# Altium PCB PCB2.PcbDoc (part 3 of 4)
Units mm, origin at the board's own origin, x right, y up, seen from the top; angles counter-clockwise.
Board outline 247 x 102 mm, 2 copper layers (Top Layer, Bottom Layer); 199 components, 195 nets, 863 pads, 110 vias.
Unrouted connection lines stored in the file: 60.
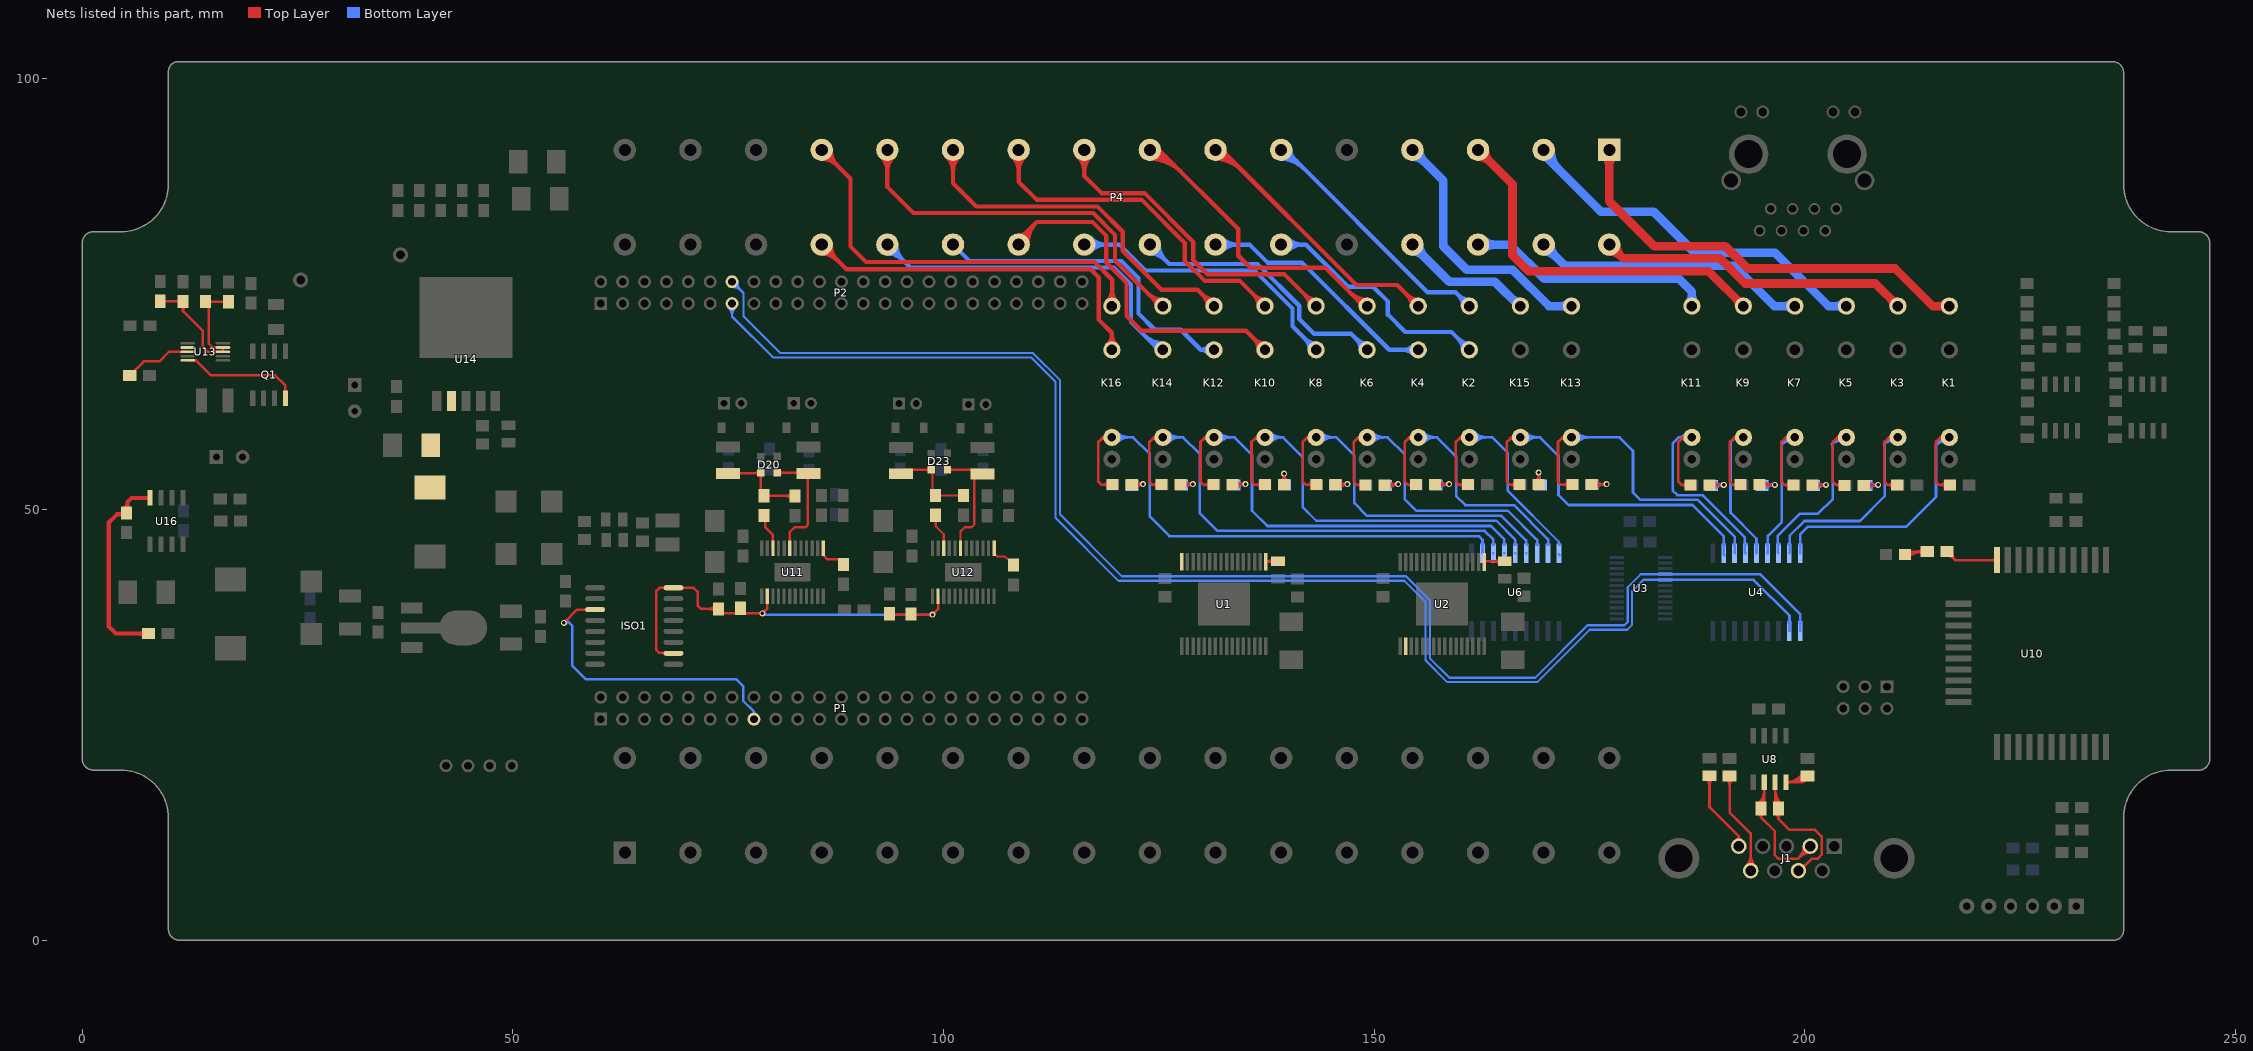
[diagram p3: the nets of this part, all layers, seen from the top]

## Via types
v1: diameter 0.7, hole 0.4, Top Layer to Bottom Layer, 110 vias

## Nets (pads, with @x,y where several pads share a name; then routed paths per layer and width w, separated by ;. In a path a pad name is that pad's centre, name@x,y a point inside that pad or via, vN(x,y) a via of type N, cw(c..) or ccw(c..) an arc to the next point about the centre after c; other vN are vias at no path point) (continued)
NetD6_1: D6.1 R6.2 | length 9
  Top Layer w0.3: D6.1@157.063,52.907 157.106,52.95 v1(158.7,52.95) ; D6.1@157.471,52.564 cw(c158.403,51.632) v1@158.403,52.95 ; D6.1@157.471,53.25 ccw(c158.195,53.974) 158.195,52.95 ; v1@158.559,52.809 ccw(c158.217,52.467) 158.217,52.95 ccw(c158.217,53.433) v1@158.559,53.091
  Bottom Layer w0.3: R6.2@157.176,52.86 157.266,52.95 v1(158.7,52.95) ; R6.2@157.434,52.729 cw(c157.967,52.196) 157.967,52.95 ; R6.2@157.646,52.517 cw(c158.691,51.472) v1@158.691,52.95 ; R6.2@157.646,53.203 ccw(c158.257,53.814) 158.257,52.95 ; v1@158.559,52.809 ccw(c158.217,52.467) 158.217,52.95 ccw(c158.217,53.433) v1@158.559,53.091
NetD7_1: D7.1 R7.2 | length 8.3
  Top Layer w0.3: D7.1@206.833,52.817 206.876,52.86 v1(208.51,52.86) ; D7.1@207.241,52.474 cw(c208.173,51.542) v1@208.173,52.86 ; D7.1@207.241,53.16 ccw(c207.965,53.884) 207.965,52.86 ; v1@208.369,52.719 ccw(c208.027,52.377) 208.027,52.86 ccw(c208.027,53.343) v1@208.369,53.001
  Bottom Layer w0.3: R7.2@207.076,52.81 207.126,52.86 v1(208.51,52.86) ; R7.2@207.546,52.467 cw(c208.495,51.518) v1@208.495,52.86 ; R7.2@207.546,53.153 ccw(c208.253,53.86) v1@208.253,52.86 ; v1@208.369,52.719 ccw(c208.027,52.377) 208.027,52.86 ccw(c208.027,53.343) v1@208.369,53.001
NetD8_1: D8.1 R8.1 | length 9.4
  Top Layer w0.3: D8.1@151.193,52.867 151.276,52.95 v1(152.78,52.95) ; D8.1@151.389,52.736 cw(c151.905,52.22) 151.905,52.95 ; D8.1@151.601,52.524 cw(c152.629,51.496) v1@152.629,52.95 ; D8.1@151.601,53.21 ccw(c152.229,53.838) 152.229,52.95 ; v1@152.639,52.809 ccw(c152.297,52.467) 152.297,52.95 ccw(c152.297,53.433) v1@152.639,53.091
  Bottom Layer w0.3: R8.1@151.3,52.79 151.46,52.95 v1(152.78,52.95) ccw(c152.78,51.694) R8.1@151.804,52.485 ; R8.1@151.571,52.674 cw(c152.151,52.204) 152.151,52.95 ; R8.1@151.77,53.133 ccw(c152.212,53.575) 152.212,52.95 ; v1@152.639,52.809 ccw(c152.297,52.467) 152.297,52.95 ccw(c152.297,53.433) v1@152.639,53.091
NetD9_1: D9.1 R9.2 | length 8.2
  Top Layer w0.3: D9.1@200.863,52.837 200.886,52.86 v1(202.45,52.86) ; D9.1@201.271,52.494 cw(c202.155,51.611) v1@202.155,52.86 ; D9.1@201.271,53.18 ccw(c202.044,53.952) 202.044,52.86 ; v1@202.309,52.719 ccw(c201.967,52.377) 201.967,52.86 ccw(c201.967,53.343) v1@202.309,53.001
  Bottom Layer w0.3: R9.2@201.016,52.81 201.066,52.86 v1(202.45,52.86) ; R9.2@201.486,52.467 cw(c202.435,51.518) v1@202.435,52.86 ; R9.2@201.486,53.153 ccw(c202.193,53.86) v1@202.193,52.86 ; v1@202.309,52.719 ccw(c201.967,52.377) 201.967,52.86 ccw(c201.967,53.343) v1@202.309,53.001
NetD10_1: D10.1 R10.1 | length 7.6
  Top Layer w0.3: D10.1@145.503,52.887 145.566,52.95 v1(146.89,52.95) ccw(c146.89,51.567) D10.1@145.911,52.544 ; D10.1@145.911,53.23 ccw(c146.587,53.906) v1@146.587,52.95 ; v1@146.749,52.809 ccw(c146.407,52.467) 146.407,52.95 ccw(c146.407,53.433) v1@146.749,53.091
  Bottom Layer w0.3: R10.1@145.73,52.82 145.86,52.95 v1(146.89,52.95) ccw(c146.89,51.839) R10.1@146.025,52.536 ; R10.1@145.99,53.183 ccw(c146.552,53.745) v1@146.552,52.95 ; v1@146.749,52.809 ccw(c146.407,52.467) 146.407,52.95 ccw(c146.407,53.433) v1@146.749,53.091
NetD11_1: D11.1 R11.2 | length 8.5
  Top Layer w0.3: D11.1@194.733,52.887 194.76,52.86 v1(196.51,52.86) ; D11.1@195.141,52.544 cw(c195.904,51.781) 195.904,52.86 ; D11.1@195.141,53.23 ccw(c196.034,54.123) 196.034,52.86 ; v1@196.369,52.719 ccw(c196.027,52.377) 196.027,52.86 ccw(c196.027,53.343) v1@196.369,53.001
  Bottom Layer w0.3: R11.2@195.016,52.81 195.066,52.86 v1(196.51,52.86) ; R11.2@195.486,52.467 cw(c196.435,51.518) v1@196.435,52.86 ; R11.2@195.486,53.153 ccw(c196.193,53.86) v1@196.193,52.86 ; v1@196.369,52.719 ccw(c196.027,52.377) 196.027,52.86 ccw(c196.027,53.343) v1@196.369,53.001
NetD12_1: D12.1 R12.1 | length 8
  Top Layer w0.3: D12.1@139.16,53.25 ccw(c138.268,54.143) v1@139.53,54.143 ; v1@139.389,54.029 cw(c139.047,53.687) 139.53,53.687 cw(c140.013,53.687) v1@139.671,54.029 ; D12.1@139.503,52.907 139.546,52.95 139.53,52.966 v1(139.53,54.17) ; v1@139.53,54.013 ccw(c140.609,54.013) D12.1@139.846,53.25
  Bottom Layer w0.3: R12.1@139.237,53.183 ccw(c138.53,53.89) v1@139.53,53.89 ; v1@139.389,54.029 cw(c139.047,53.687) 139.53,53.687 cw(c140.013,53.687) v1@139.671,54.029 ; v1@139.53,54.132 ccw(c140.872,54.132) R12.1@139.923,53.183 ; v1(139.53,54.17) 139.53,52.89 R12.1@139.58,52.84 R12.1@139.69,52.95
NetD13_1: D13.1 R13.2 | length 8.3
  Top Layer w0.3: D13.1@188.903,52.867 188.91,52.86 v1(190.58,52.86) ; D13.1@189.311,52.524 cw(c190.122,51.713) 190.122,52.86 ; D13.1@189.311,53.21 ccw(c190.156,54.055) 190.156,52.86 ; v1@190.439,52.719 ccw(c190.097,52.377) 190.097,52.86 ccw(c190.097,53.343) v1@190.439,53.001
  Bottom Layer w0.3: R13.2@189.146,52.81 189.196,52.86 v1(190.58,52.86) ; R13.2@189.616,52.467 cw(c190.565,51.518) v1@190.565,52.86 ; R13.2@189.616,53.153 ccw(c190.323,53.86) v1@190.323,52.86 ; v1@190.439,52.719 ccw(c190.097,52.377) 190.097,52.86 ccw(c190.097,53.343) v1@190.439,53.001
NetD14_1: D14.1 R14.1 | length 7.9
  Top Layer w0.3: D14.1@133.553,52.907 133.596,52.95 v1(135.05,52.95) ; D14.1@133.961,52.564 cw(c134.893,51.632) v1@134.893,52.95 ; D14.1@133.961,53.25 ccw(c134.685,53.974) 134.685,52.95 ; v1@134.909,52.809 ccw(c134.567,52.467) 134.567,52.95 ccw(c134.567,53.433) v1@134.909,53.091
  Bottom Layer w0.3: R14.1@133.69,52.83 133.81,52.95 v1(135.05,52.95) ccw(c135.05,51.876) R14.1@134.201,52.533 ; R14.1@134.16,53.173 ccw(c134.698,53.711) 134.698,52.95 ; v1@134.909,52.809 ccw(c134.567,52.467) 134.567,52.95 ccw(c134.567,53.433) v1@134.909,53.091
NetD15_1: D15.1 R15.2 | length 8.7
  Top Layer w0.3: D15.1@175.243,52.907 175.286,52.95 v1(176.99,52.95) ; D15.1@175.651,52.564 cw(c176.583,51.632) 176.583,52.95 ; D15.1@175.651,53.25 ccw(c176.375,53.974) 176.375,52.95 ; v1@176.849,52.809 ccw(c176.507,52.467) 176.507,52.95 ccw(c176.507,53.433) v1@176.849,53.091
  Bottom Layer w0.3: R15.2@175.276,52.88 175.346,52.95 v1(176.99,52.95) ; R15.2@175.746,52.537 cw(c176.743,51.54) v1@176.743,52.95 ; R15.2@175.746,53.223 ccw(c176.405,53.882) 176.405,52.95 ; v1@176.849,52.809 ccw(c176.507,52.467) 176.507,52.95 ccw(c176.507,53.433) v1@176.849,53.091
NetD16_1: D16.1 R16.1 | length 7.6
  Top Layer w0.3: D16.1@127.503,52.927 127.526,52.95 v1(128.94,52.95) ; D16.1@127.911,52.584 cw(c128.795,51.701) v1@128.795,52.95 ; D16.1@127.911,53.27 ccw(c128.684,54.042) v1@128.684,52.95 ; v1@128.799,52.809 ccw(c128.457,52.467) 128.457,52.95 ccw(c128.457,53.433) v1@128.799,53.091
  Bottom Layer w0.3: R16.1@127.81,52.8 127.96,52.95 v1(128.94,52.95) ; R16.1@128.08,53.183 ccw(c128.642,53.745) v1@128.642,52.95 ; R16.1@128.122,52.546 cw(c128.94,51.921) v1(128.94,52.95) ; v1@128.799,52.809 ccw(c128.457,52.467) 128.457,52.95 ccw(c128.457,53.433) v1@128.799,53.091
NetD17_1: D17.1 R17.2 | length 9
  Top Layer w0.3: D17.1@168.74,53.25 ccw(c167.92,54.07) v1@169.08,54.07 ; v1@168.939,54.159 cw(c168.597,53.817) 169.08,53.817 cw(c169.563,53.817) v1@169.221,54.159 ; v1@169.08,54.086 ccw(c170.262,54.086) D17.1@169.426,53.25 ; v1(169.08,54.3) 169.08,52.91 D17.1@169.083,52.907 D17.1@169.126,52.95
  Bottom Layer w0.3: R17.2@168.826,53.173 ccw(c168.213,53.786) 169.08,53.786 ; v1@168.939,54.159 cw(c168.597,53.817) 169.08,53.817 cw(c169.563,53.817) v1@169.221,54.159 ; 169.08,53.492 ccw(c169.831,53.492) R17.2@169.3,52.961 ; v1@169.08,54.216 ccw(c170.555,54.216) R17.2@169.512,53.173 ; v1(169.08,54.3) 169.08,53.046 R17.2@169.296,52.83 R17.2@169.416,52.95
NetD18_1: D18.1 R18.1 | length 7.5
  Top Layer w0.3: D18.1@121.843,52.907 121.886,52.95 v1(123.15,52.95) ccw(c123.15,51.711) D18.1@122.257,52.571 ; D18.1@121.863,52.87 D18.1@121.863,52.907 ; D18.1@122.251,53.25 ccw(c122.975,53.974) v1@122.975,52.95 ; v1@123.009,52.809 ccw(c122.667,52.467) 122.667,52.95 ccw(c122.667,53.433) v1@123.009,53.091
  Bottom Layer w0.3: R18.1@121.86,52.82 121.86,52.87 121.94,52.95 v1(123.15,52.95) ccw(c123.15,52.077) R18.1@122.415,52.548 ; R18.1@122.35,53.153 ccw(c122.84,53.643) v1@122.84,52.95 ; v1@123.009,52.809 ccw(c122.667,52.467) 122.667,52.95 ccw(c122.667,53.433) v1@123.009,53.091
NetD19_2: D19.2 R35.2 | length 7.8
  Top Layer w0.3: D19.2@211.46,44.5 212.07,45.11 R35.2@214.204,45.11 ; D19.2@211.813,44.672 cw(c212.87,43.615) 212.87,45.11 ; D19.2@212.025,44.46 cw(c213.594,42.891) R35.2@213.594,45.11 ; R35.2@213.734,44.767 ccw(c212.906,43.939) 212.906,45.11 ccw(c212.906,46.281) R35.2@213.734,45.453
NetD20_2: D20.2 FB1.1 R36.2 R37.2 | length 14.2
  Top Layer w0.3: FB1.1@74.98,54.206 78.716,54.206 D20.2@78.78,54.27 78.78,51.966 R36.2@79.15,51.596 82.72,51.596 R37.2@82.75,51.566 ; 77.962,54.206 ccw(c77.962,55.088) D20.2@78.586,54.464 ; 78.271,54.206 cw(c78.271,53.761) 78.586,54.076 cw(c78.116,53.606) 78.78,53.606 cw(c79.444,53.606) D20.2@78.974,54.076 ; 81.507,51.596 cw(c81.507,50.323) R37.2@82.407,51.223 ; 81.652,51.596 ccw(c81.652,52.664) R37.2@82.407,51.909
NetD20_3: D20.3 R40.1 U11.19 | length 15
  Top Layer w0.3: D20.3@80.68,54.27 84.236,54.27 R40.1@84.3,54.206 84.25,54.156 84.25,48.24 83.95,47.94 82.71,47.94 82.135,47.365 U11.19@82.135,45.506 ; D20.3@80.874,54.076 cw(c81.344,53.606) 81.344,54.27 cw(c81.344,54.934) D20.3@80.874,54.464
NetD23_2: D23.2 FB2.1 R41.2 R42.2 | length 11.5
  Top Layer w0.254: FB2.1@95.05,54.156 95.524,54.63 D23.2@98.56,54.63 98.73,54.46 98.73,51.626 R42.2@102.31,51.626 ; D23.2@98.349,54.419 ccw(c97.841,53.911) 97.841,54.63 ccw(c97.841,55.349) D23.2@98.349,54.841
NetD23_3: D23.3 R44.1 U12.19 | length 15.4
  Top Layer w0.254: D23.3@100.46,54.63 104.006,54.63 R44.1@104.5,54.136 ; D23.3@100.671,54.419 cw(c101.179,53.911) 101.179,54.63 cw(c101.179,55.349) D23.3@100.671,54.841 ; U12.19@101.965,45.506 101.965,47.455 102.45,47.94 103.24,47.94 103.55,48.25 103.55,53.58 R44.1@104.17,54.2
NetD28_2: D28.1 L2.1 U14.2
NetJ1_2: J1.2 R24.2 U8.6 | length 24.4
  Top Layer w0.3: R24.2@194.571,15.788 ccw(c192.868,17.491) U8.6@195.276,17.491 ; R24.2@194.659,14.702 cw(c194.378,14.246) 194.914,14.246 ; R24.2@194.783,15.576 ccw(c193.593,16.766) 195.276,16.766 ; R24.2@194.995,15.364 ccw(c194.317,16.042) R24.2@195.276,16.042 ; R24.2@195.169,14.702 ccw(c195.45,14.246) 194.914,14.246 ; U8.6@195.17,17.624 cw(c194.914,17.368) 195.276,17.368 cw(c195.638,17.368) U8.6@195.382,17.624 ; U8.6@195.276,18.33 195.276,15.642 R24.2@194.914,15.28 194.914,14.246 ; J1.2@199.886,10.92 cw(c198.075,10.92) 199.356,9.64 cw(c200.636,8.359) J1.2@200.636,10.17 ; J1.2@200.186,10.92 cw(c199.1,10.92) 199.868,10.152 cw(c200.636,9.384) J1.2@200.636,10.47 ; J1.2@200.636,10.92 199.156,9.44 196.95,9.44 196.5,9.89 196.5,12.66 194.914,14.246
NetJ1_5: J1.5 R26.2 | length 12.5
  Top Layer w0.3: R26.2@188.567,18.751 cw(c187.715,17.899) 188.92,17.899 ; R26.2@188.91,19.094 188.92,19.084 188.92,15.44 192.326,12.034 ; 188.92,17.947 cw(c190.057,17.947) R26.2@189.253,18.751 ; J1.5@192.044,11.615 ccw(c191.874,12.034) 192.326,12.034 ; J1.5@192.326,10.92 192.326,12.034 ; J1.5@192.608,11.615 cw(c192.778,12.034) 192.326,12.034
NetJ1_7: J1.7 R24.1 U8.7 | length 22.2
  Top Layer w0.3: U8.7@196.44,17.624 cw(c196.184,17.368) 196.546,17.368 cw(c196.908,17.368) U8.7@196.652,17.624 ; 196.546,16.132 ccw(c197.633,16.132) R24.1@196.865,15.364 ; 196.546,16.857 ccw(c198.358,16.857) R24.1@197.077,15.576 ; U8.7@196.546,17.581 ccw(c199.082,17.581) R24.1@197.289,15.788 ; U8.7@196.546,18.33 196.546,15.628 R24.1@196.92,15.254 ; R24.1@196.62,14.755 cw(c196.008,14.08) 196.92,14.08 cw(c197.739,14.08) R24.1@197.241,14.73 ; R24.1@196.946,15.28 R24.1@196.92,15.254 ; J1.7@199.251,8.08 199.42,8.08 200.78,9.44 201.46,9.44 201.94,9.92 201.94,12.05 201.19,12.8 198.2,12.8 196.92,14.08 R24.1@196.92,15.254
NetJ1_9: J1.9 R25.1 | length 18.4
  Top Layer w0.3: R25.1@190.917,18.741 cw(c190.089,17.913) 191.26,17.913 cw(c192.431,17.913) R25.1@191.603,18.741 ; R25.1@191.26,19.084 191.26,14.85 193.711,12.399 J1.9@193.711,8.08 ; J1.9@193.181,8.61 ccw(c191.9,9.891) 193.711,9.891 ccw(c195.522,9.891) J1.9@194.241,8.61 ; J1.9@193.393,8.398 ccw(c192.625,9.166) 193.711,9.166 ccw(c194.797,9.166) J1.9@194.029,8.398
NetQ1_4: Q1.4 U13.10 | length 14.6
  Top Layer w0.3: U13.10@12.23,67.31 13.21,67.31 14.94,65.58 22.4,65.58 23.58,64.4 23.58,62.964 Q1.4@23.594,62.95 ; Q1.4@23.488,63.656 ccw(c23.265,63.879) 23.58,63.879 ; 23.58,63.945 ccw(c23.989,63.945) Q1.4@23.7,63.656
NetR1_2: R1.2 U1.17 | length 3
  Top Layer w0.3: U1.17@137.41,43.93 137.46,43.98 R1.2@138.84,43.98 ; R1.2@138.307,43.697 ccw(c137.624,43.014) 137.624,43.98 ccw(c137.624,44.946) R1.2@138.307,44.263
NetR2_2: R2.2 U2.17 | length 3.9
  Top Layer w0.3: U2.17@162.76,43.91 162.83,43.98 R2.2@165.15,43.98 ; R2.2@164.617,43.697 ccw(c163.934,43.014) 163.934,43.98 ccw(c163.934,44.946) R2.2@164.617,44.263
NetR20_1: R20.1 U8.8 | length 11.2
  Top Layer w0.3: U8.8@197.922,18.224 cw(c198.178,17.968) 198.178,18.33 cw(c198.178,18.692) U8.8@197.922,18.436 ; 198.378,18.33 ccw(c198.378,20.259) R20.1@199.981,19.187 ; 198.939,18.33 ccw(c198.939,19.883) R20.1@200.231,19.02 ; 199.501,18.33 ccw(c199.501,19.508) R20.1@200.48,18.853 ; R20.1@199.702,18.866 cw(c199.351,18.69) 199.629,18.413 cw(c200.082,17.959) R20.1@200.112,18.6 ; R20.1@199.732,19.354 cw(c197.816,20.634) U8.8@197.816,18.33 199.546,18.33 R20.1@200.3,19.084
NetR35_1: R35.1 U10.11 | length 8.6
  Top Layer w0.3: R35.1@216.49,45.11 217.466,44.134 U10.11@222.28,44.134 ; R35.1@216.617,44.625 cw(c216.617,43.761) 217.228,44.372 ; R35.1@217.099,45.058 ccw(c218.149,44.944) 217.402,44.198 ; U10.11@222.139,43.993 ccw(c221.797,43.651) 221.797,44.134 ccw(c221.797,44.617) U10.11@222.139,44.275
NetR36_1: R36.1 U11.22 | length 4.2
  Top Layer w0.3: R36.1@79.15,49.31 79.29,49.17 79.29,47.95 80.184,47.056 U11.22@80.184,45.506
NetR39_2: R39.2 U11.13 | length 3.3
  Top Layer w0.3: U11.13@86.036,45.506 86.036,44.704 86.49,44.25 87.82,44.25 R39.2@88.2,43.87
NetR41_1: R41.1 U12.22 | length 4.2
  Top Layer w0.254: R41.1@99.04,49.34 99.1,49.28 99.1,48.06 100.014,47.146 U12.22@100.014,45.506
NetR43_2: R43.2 U12.13 | length 3.4
  Top Layer w0.254: U12.13@105.866,45.506 105.866,44.924 106.23,44.56 107.096,44.56 R43.2@108.11,43.546
NetR46_1: R46.1 R49.2 U13.4 | length 9.3
  Top Layer w0.3: R49.2@14.28,74.154 14.69,73.744 14.69,69.25 15.13,68.81 U13.4@16.33,68.81 ; R49.2@14.56,74.05 14.64,74.13 R46.1@16.96,74.13
NetR47_1: R47.1 R50.2 U13.3 | length 13.1
  Top Layer w0.3: R47.1@9.05,74.18 9.066,74.164 R50.2@11.68,74.164 11.68,73.05 ; R50.2@11.384,73.653 cw(c10.918,73.05) 11.68,73.05 ; R50.2@11.976,73.653 ccw(c12.442,73.05) 11.68,73.05 ; 16.33,68.61 U13.3@16.33,68.31 14.58,68.31 13.99,68.9 13.99,70.74 11.68,73.05
NetR48_2: R48.2 U13.8 | length 7.9
  Top Layer w0.3: R48.2@5.504,65.56 7.154,67.21 8.94,67.21 10.04,68.31 U13.8@12.23,68.31
NetR51_2: U13.7
NetR54_1: R54.1 R55.1 U16.4 | length 28
  Top Layer w0.5: 4.117,49.44 ccw(c4.117,50.516) R55.1@4.878,49.755 ; 4.324,49.44 cw(c4.324,48.657) R55.1@4.878,49.211 ; R55.1@4.885,50.016 ccw(c4.055,50.89) 5.26,50.89 ; 5.26,50.401 ccw(c5.814,50.401) R55.1@5.422,50.009 ; R54.1@7.281,35.328 ccw(c6.624,34.671) 6.624,35.6 ccw(c6.624,36.529) R54.1@7.281,35.872 ; R54.1@7.68,35.6 3.9,35.6 3.08,36.42 3.08,48.49 4.03,49.44 4.98,49.44 5.26,49.72 5.26,50.89 ; U16.4@7.876,51.35 5.72,51.35 5.26,50.89
NetU1_32: U1.32 U2.2
O5V_ISO: C20.1 C21.1 C31.1 C32.1 ISO1.10 ISO1.16 U11.2 U12.2 | length 60.3
  Top Layer w0.3: 67.319,33.35 cw(c67.319,32.834) ISO1.10@67.684,33.199 ; 67.392,40.91 ccw(c67.392,41.323) ISO1.16@67.684,41.031 ; 67.464,40.91 cw(c67.464,40.599) ISO1.16@67.684,40.819 ; ISO1.10@68.64,33.305 68.595,33.35 66.98,33.35 66.65,33.68 66.65,40.54 67.02,40.91 70.97,40.91 71.47,40.41 71.47,38.81 71.81,38.47 C21.1@73.86,38.47 74.38,37.95 v1(78.96,37.95) 79.532,38.522 U11.2@79.532,39.944 ; ISO1.16@68.64,40.925 ISO1.16@68.655,40.91 ; ISO1.16@69.596,40.819 cw(c69.816,40.599) 69.816,40.91 ; ISO1.16@69.596,41.031 ccw(c69.888,41.323) 69.888,40.91 ; C21.1@73.517,38.127 ccw(c72.689,37.299) 72.689,38.47 ccw(c72.689,39.641) C21.1@73.517,38.813 ; v1@78.819,37.809 ccw(c78.477,37.467) 78.477,37.95 ccw(c78.477,38.433) v1@78.819,38.091 ; v1@78.96,38.15 ccw(c78.96,38.633) 79.301,38.291 ccw(c79.643,37.95) v1@79.16,37.95 ; C31.1@93.72,37.9 93.82,37.8 v1(98.71,37.8) 99.362,38.452 U12.2@99.362,39.944 ; v1@98.569,37.659 ccw(c98.227,37.317) 98.227,37.8 ccw(c98.227,38.283) v1@98.569,37.941 ; v1@98.71,38 ccw(c98.71,38.483) 99.051,38.141 ccw(c99.393,37.8) v1@98.91,37.8
  Bottom Layer w0.3: v1(78.96,37.95) 79.11,37.8 v1(98.71,37.8) ; v1@98.569,37.659 ccw(c98.227,37.317) 98.227,37.8 ccw(c98.227,38.283) v1@98.569,37.941
OUT_C\S\: ISO1.3 P1.15 | length 37.8
  Top Layer w0.3: v1(55.92,36.85) 57.455,38.385 ISO1.3@59.54,38.385 ; v1@55.92,37.05 ccw(c55.92,37.533) 56.261,37.191 ccw(c56.603,36.85) v1@56.12,36.85 ; ISO1.3@58.584,38.279 ccw(c58.328,38.023) 58.328,38.385 ccw(c58.328,38.747) ISO1.3@58.584,38.491
  Bottom Layer w0.3: v1(55.92,36.85) 56.03,36.96 56.43,36.96 ; v1@56.098,36.758 cw(c56.43,36.586) 56.43,36.96 ; P1.15@77.756,26.216 ccw(c77.627,26.542) 77.978,26.542 ; P1.15@77.978,25.658 77.978,26.542 ; P1.15@78.2,26.216 cw(c78.329,26.542) 77.978,26.542 ; 56.43,36.96 56.91,36.48 56.91,31.86 58.45,30.32 75.89,30.32 76.72,29.49 76.72,27.8 77.978,26.542
OUT_PIN0: K1.1 P4.1 | length 55.4
  Top Layer w1: P4.1@176.726,91.194 cw(c175.361,89.829) 177.292,89.829 cw(c179.223,89.829) P4.1@177.858,91.194 ; P4.1@177.292,91.76 177.292,85.788 182.5,80.58 190.76,80.58 193.36,77.98 210.47,77.98 214.828,73.622 K1.1@216.774,73.622 ; K1.1@216.42,73.268 ccw(c215.567,72.415) 215.567,73.622 ccw(c215.567,74.829) K1.1@216.42,73.976
OUT_PIN1: K3.1 P4.2 | length 41.4
  Top Layer w1: P4.2@177.292,79.96 cw(c177.292,78.029) 178.658,79.394 cw(c180.023,80.76) P4.2@178.092,80.76 ; P4.2@177.292,80.76 178.862,79.19 190.12,79.19 193.06,76.25 208.167,76.25 K3.1@210.795,73.622 ; K3.1@210.295,73.622 ccw(c209.088,73.622) 209.942,74.476 ccw(c210.795,75.329) K3.1@210.795,74.122
OUT_PIN2: K5.1 P4.3 | length 47.4
  Bottom Layer w1: P4.3@169.672,91.76 169.672,91.228 176.32,84.58 182.44,84.58 187.2,79.82 196.54,79.82 202.738,73.622 K5.1@204.816,73.622 ; P4.3@170.472,91.76 ccw(c173.688,91.76) 171.414,89.486 ; K5.1@204.463,73.268 ccw(c203.609,72.415) 203.609,73.622 ccw(c203.609,74.829) K5.1@204.463,73.976
OUT_PIN3: K7.1 P4.4 | length 37.1
  Bottom Layer w1: P4.4@169.672,79.96 cw(c169.672,78.029) 171.038,79.394 cw(c172.403,80.76) P4.4@170.472,80.76 ; P4.4@169.672,80.76 172.112,78.32 191.75,78.32 196.448,73.622 K7.1@198.837,73.622 ; K7.1@198.484,73.268 ccw(c197.63,72.415) 197.63,73.622 ccw(c197.63,74.829) K7.1@198.484,73.976
OUT_PIN4: K9.1 P4.5 | length 48.1
  Top Layer w1: P4.5@162.052,90.96 cw(c162.052,89.029) 163.418,90.394 cw(c164.783,91.76) P4.5@162.852,91.76 ; P4.5@162.052,91.76 166.05,87.762 166.05,79.53 167.9,77.68 188.801,77.68 K9.1@192.859,73.622 ; K9.1@192.359,73.622 ccw(c191.151,73.622) 192.005,74.476 ccw(c192.859,75.329) K9.1@192.859,74.122
OUT_PIN5: K11.1 P4.6 | length 33.7
  Bottom Layer w1: P4.6@162.052,80.76 165.77,80.76 169.73,76.8 185.37,76.8 186.88,75.29 K11.1@186.88,73.622 ; P4.6@162.618,80.194 cw(c163.983,78.829) 163.983,80.76 cw(c163.983,82.691) P4.6@162.618,81.326 ; K11.1@186.526,73.976 ccw(c185.673,74.829) 186.88,74.829 ccw(c188.087,74.829) K11.1@187.233,73.976
OUT_PIN6: K13.1 P4.7 | length 35.4
  Bottom Layer w1: P4.7@154.432,90.96 cw(c154.432,89.029) 155.798,90.394 cw(c157.163,91.76) P4.7@155.232,91.76 ; P4.7@154.432,91.76 158,88.192 158,80.58 160.74,77.84 166.06,77.84 170.278,73.622 K13.1@172.898,73.622 ; K13.1@172.544,73.268 ccw(c171.691,72.415) 171.691,73.622 ccw(c171.691,74.829) K13.1@172.544,73.976
OUT_PIN7: K15.1 P4.8 | length 20
  Bottom Layer w1: P4.8@154.25,80.92 158.71,76.46 164,76.46 166.838,73.622 K15.1@166.969,73.622 ; P4.8@154.432,79.96 cw(c154.432,78.082) 155.76,79.41 ; P4.8@155.232,80.76 ccw(c157.216,80.76) 155.813,79.357 ; 165.892,74.568 ccw(c166.969,75.644) K15.1@166.969,74.122
OUT_PIN8: K2.1 P4.11 | length 39.3
  Bottom Layer w0.5: P4.11@138.47,91.67 139.75,91.67 156.19,75.23 159.431,75.23 K2.1@161.039,73.622 ; P4.11@139.192,90.71 cw(c139.192,87.045) 141.783,89.637 ; P4.11@139.192,91.21 cw(c139.192,88.752) 140.93,90.49 ; P4.11@139.192,91.76 P4.11@139.7,91.76 ; P4.11@140.242,91.76 ccw(c141.647,91.76) 140.654,90.766 ; K2.1@160.289,73.622 ccw(c158.478,73.622) 159.759,74.902 ccw(c161.039,76.183) K2.1@161.039,74.372
OUT_PIN9: K2.2 P4.12 | length 36.7
  Bottom Layer w0.5: P4.12@139.192,80.76 142.04,80.76 146.93,75.87 149.86,75.87 151.58,74.15 151.58,72.63 153.6,70.61 158.971,70.61 K2.2@161.039,68.542 ; P4.12@139.581,80.371 cw(c140.52,79.432) 140.52,80.76 cw(c140.52,82.088) P4.12@139.581,81.149 ; P4.12@139.934,80.018 cw(c141.727,78.225) 141.727,80.76 cw(c141.727,83.295) P4.12@139.934,81.502 ; K2.2@160.289,68.542 ccw(c158.478,68.542) 159.759,69.822 ccw(c161.039,71.103) K2.2@161.039,69.292
OUT_PIN10: K4.1 P4.13 | length 41.5
  Top Layer w0.5: P4.13@131.572,90.71 cw(c131.572,86.562) 134.505,89.495 ; P4.13@131.572,91.21 cw(c131.572,88.269) 133.651,90.349 ; P4.13@131.572,91.71 cw(c131.572,89.977) 132.798,91.202 ; P4.13@131.572,91.76 131.852,91.48 132.52,91.48 147.93,76.07 152.662,76.07 K4.1@155.11,73.622 ; P4.13@132.622,91.76 ccw(c133.544,91.76) 132.892,91.108 ; K4.1@154.36,73.622 ccw(c152.549,73.622) 153.829,74.902 ccw(c155.11,76.183) K4.1@155.11,74.372
OUT_PIN11: K4.2 P4.14 | length 37.5
  Bottom Layer w0.5: P4.14@131.572,80.76 135.53,80.76 137.62,78.67 141.61,78.67 151.738,68.542 K4.2@155.11,68.542 ; P4.14@131.961,80.371 cw(c132.9,79.432) 132.9,80.76 cw(c132.9,82.088) P4.14@131.961,81.149 ; P4.14@132.314,80.018 cw(c134.107,78.225) 134.107,80.76 cw(c134.107,83.295) P4.14@132.314,81.502 ; K4.2@154.579,68.012 ccw(c153.299,66.731) 153.299,68.542 ccw(c153.299,70.353) K4.2@154.579,69.072
OUT_PIN12: K6.1 P4.15 | length 47.9
  Top Layer w0.5: P4.15@123.952,90.71 cw(c123.952,85.597) 127.568,89.212 ; P4.15@123.952,91.21 cw(c123.952,87.304) 126.714,90.066 ; P4.15@123.952,91.71 cw(c123.952,89.011) 125.861,90.919 ; P4.15@123.952,91.76 125.02,91.76 134.22,82.56 134.22,79.47 135.602,78.088 144.272,78.088 148.738,73.622 K6.1@149.18,73.622 ; 147.145,75.215 ccw(c149.18,77.25) K6.1@149.18,74.372 ; 147.999,74.361 ccw(c149.18,75.543) K6.1@149.18,73.872 ; 148.213,74.147 cw(c147.687,73.622) K6.1@148.43,73.622
OUT_PIN13: K6.2 P4.16 | length 40.1
  Bottom Layer w0.5: P4.16@123.952,79.71 cw(c123.952,77.175) 125.744,78.968 cw(c127.537,80.76) P4.16@125.002,80.76 ; P4.16@123.952,80.21 cw(c123.952,78.882) 124.891,79.821 cw(c125.83,80.76) P4.16@124.502,80.76 ; P4.16@123.952,80.76 126.198,78.514 136.456,78.514 141.3,73.67 141.3,72.13 143.01,70.42 147.302,70.42 K6.2@149.18,68.542 ; K6.2@148.43,68.542 ccw(c146.62,68.542) 147.9,69.822 ccw(c149.18,71.103) K6.2@149.18,69.292
OUT_PIN14: K8.1 P4.17 | length 46.4
  Top Layer w0.5: P4.17@115.59,91.018 cw(c113.797,89.225) 116.332,89.225 cw(c118.867,89.225) P4.17@117.074,91.018 ; P4.17@115.943,91.371 cw(c115.004,90.432) 116.332,90.432 cw(c117.66,90.432) P4.17@116.721,91.371 ; P4.17@116.332,91.76 116.332,88.728 118.326,86.734 123.316,86.734 128.99,81.06 128.99,78.946 130.602,77.334 139.539,77.334 K8.1@143.251,73.622 ; K8.1@142.501,73.622 ccw(c140.69,73.622) 141.97,74.902 ccw(c143.251,76.183) K8.1@143.251,74.372
OUT_PIN15: K8.2 P4.18 | length 42.1
  Bottom Layer w0.5: P4.18@116.332,80.76 120.43,80.76 123.43,77.76 136.11,77.76 140.52,73.35 140.52,71.273 K8.2@143.251,68.542 ; P4.18@116.721,80.371 cw(c117.66,79.432) 117.66,80.76 cw(c117.66,82.088) P4.18@116.721,81.149 ; P4.18@117.074,80.018 cw(c118.867,78.225) 118.867,80.76 cw(c118.867,83.295) P4.18@117.074,81.502 ; K8.2@142.501,68.542 ccw(c140.69,68.542) 141.97,69.822 ccw(c143.251,71.103) K8.2@143.251,69.292
OUT_PIN16: K10.1 P4.19 | length 48.4
  Top Layer w0.5: P4.19@107.97,91.018 cw(c106.177,89.225) 108.712,89.225 cw(c111.247,89.225) P4.19@109.454,91.018 ; P4.19@108.323,91.371 cw(c107.384,90.432) 108.712,90.432 cw(c110.04,90.432) P4.19@109.101,91.371 ; P4.19@108.712,91.76 108.712,88.068 110.8,85.98 122.97,85.98 128.01,80.94 128.01,78.86 130.29,76.58 134.363,76.58 K10.1@137.321,73.622 ; K10.1@136.571,73.622 ccw(c134.761,73.622) 136.041,74.902 ccw(c137.321,76.183) K10.1@137.321,74.372
OUT_PIN17: K10.2 P4.20 | length 48.9
  Top Layer w0.5: P4.20@108.712,80.76 108.712,81.282 110.82,83.39 ; P4.20@108.712,81.81 ccw(c108.712,83.085) 109.613,82.183 ; P4.20@109.262,80.769 cw(c111.732,80.808) 109.985,82.555 ; P4.20@109.762,80.777 cw(c113.375,80.834) 110.82,83.39 ; K10.2@136.571,68.542 ccw(c134.761,68.542) 136.041,69.822 ccw(c137.321,71.103) K10.2@137.321,69.292 ; K10.2@137.321,68.542 135.113,70.75 122.99,70.75 121.24,72.5 121.24,76.31 118.9,78.65 118.9,81.77 117.28,83.39 110.82,83.39
OUT_PIN18: K12.1 P4.21 | length 50.5
  Top Layer w0.5: P4.21@100.35,91.018 cw(c98.557,89.225) 101.092,89.225 cw(c103.627,89.225) P4.21@101.834,91.018 ; P4.21@100.703,91.371 cw(c99.764,90.432) 101.092,90.432 cw(c102.42,90.432) P4.21@101.481,91.371 ; P4.21@101.092,91.76 101.092,87.878 103.796,85.174 117.876,85.174 120.8,82.25 120.8,80.02 125.3,75.52 129.494,75.52 K12.1@131.392,73.622 131.508,73.622 K12.1@131.59,73.54 ; K12.1@130.642,73.622 ccw(c128.831,73.622) 130.112,74.902 ccw(c131.392,76.183) K12.1@131.392,74.372
OUT_PIN19: K12.2 P4.22 | length 40
  Bottom Layer w0.5: P4.22@101.092,80.76 102.998,78.854 120.666,78.854 122.63,76.89 122.63,72.76 124.52,70.87 127.53,70.87 129.858,68.542 ; K12.2@130.8,68.081 ccw(c129.858,67.349) 129.858,68.542 ; K12.2@130.8,69.003 cw(c129.858,69.735) 129.858,68.542 ; K12.2@131.392,68.542 129.858,68.542
OUT_PIN20: K14.1 P4.23 | length 53.7
  Top Layer w0.5: P4.23@92.73,91.018 cw(c90.937,89.225) 93.472,89.225 cw(c96.007,89.225) P4.23@94.214,91.018 ; P4.23@93.083,91.371 cw(c92.144,90.432) 93.472,90.432 cw(c94.8,90.432) P4.23@93.861,91.371 ; P4.23@93.472,91.76 93.472,87.458 96.51,84.42 117.38,84.42 119.91,81.89 119.91,78.88 125.168,73.622 K14.1@125.462,73.622 ; 123.679,75.111 ccw(c125.462,76.894) K14.1@125.462,74.372 ; 124.39,74.4 cw(c123.613,73.622) K14.1@124.712,73.622 ; 124.533,74.257 ccw(c125.462,75.186) K14.1@125.462,73.872
OUT_PIN21: K14.2 P4.24 | length 49.8
  Bottom Layer w0.5: P4.24@93.472,79.71 cw(c93.472,77.175) 95.264,78.968 cw(c97.057,80.76) P4.24@94.522,80.76 ; P4.24@93.472,80.21 cw(c93.472,78.882) 94.411,79.821 cw(c95.35,80.76) P4.24@94.022,80.76 ; P4.24@93.472,80.76 96.132,78.1 119.76,78.1 121.76,76.1 121.76,71.78 124.998,68.542 K14.2@125.462,68.542 ; 123.389,70.151 ccw(c125.462,72.224) K14.2@125.462,69.292 ; 124.243,69.297 ccw(c125.462,70.517) K14.2@125.462,68.792 ; 124.511,69.029 cw(c124.023,68.542) K14.2@124.712,68.542
OUT_PIN22: K16.1 P4.25 | length 56.6
  Top Layer w0.5: P4.25@85.852,90.71 cw(c85.852,88.175) 87.644,89.968 cw(c89.437,91.76) P4.25@86.902,91.76 ; P4.25@85.852,91.21 cw(c85.852,89.882) 86.791,90.821 cw(c87.73,91.76) P4.25@86.402,91.76 ; P4.25@85.852,91.76 89.2,88.412 89.2,80.54 91,78.74 117.53,78.74 119.58,76.69 119.58,73.669 K16.1@119.533,73.622 ; K16.1@119.003,74.152 ccw(c117.609,75.546) 119.58,75.546 ; 119.58,75.319 ccw(c121.23,75.319) K16.1@120.063,74.152
OUT_PIN23: K16.2 P4.26 | length 51.7
  Top Layer w0.5: P4.26@85.852,79.71 cw(c85.852,77.175) 87.644,78.968 cw(c89.437,80.76) P4.26@86.902,80.76 ; P4.26@85.852,80.21 cw(c85.852,78.882) 86.791,79.821 cw(c87.73,80.76) P4.26@86.402,80.76 ; P4.26@85.852,80.76 88.722,77.89 117.09,77.89 118,76.98 118,72.06 119.533,70.527 K16.2@119.533,68.542 ; K16.2@119.003,69.072 ccw(c117.722,70.353) 119.533,70.353 ccw(c121.344,70.353) K16.2@120.063,69.072
OUT_SIG0: D4.2 K1.3 U4.18 | length 43.8
  Top Layer w0.3: 215.28,57.926 cw(c216.134,57.072) K1.3@216.664,58.157 ; 215.578,58.223 cw(c216.329,57.471) K1.3@216.796,58.427 ; D4.2@216.445,52.524 ccw(c215.617,51.696) 215.617,52.867 ccw(c215.617,54.038) D4.2@216.445,53.21 ; D4.2@216.588,52.867 215.577,52.867 215.204,53.24 215.204,57.85 215.734,58.38 K1.3@216.772,58.38
  Bottom Layer w0.3: U4.18@199.369,45.889 ccw(c199.172,46.086) 199.45,46.086 ; 199.45,46.134 ccw(c199.797,46.134) U4.18@199.551,45.889 ; U4.18@199.46,44.921 199.45,44.931 199.45,47.13 200.34,48.02 211.78,48.02 215.22,51.46 215.22,57.46 216.142,58.382 K1.3@216.774,58.382 ; 215.264,57.504 cw(c216.239,56.528) K1.3@216.622,57.854 ; 215.623,57.863 cw(c216.4,57.086) K1.3@216.705,58.142 ; 215.77,58.01 ccw(c215.398,58.382) K1.3@215.924,58.382
OUT_SIG1: D5.2 K3.3 U4.17 | length 39.6
  Top Layer w0.3: 209.301,57.926 cw(c210.156,57.072) K3.3@210.685,58.157 ; 209.599,58.223 cw(c210.351,57.471) K3.3@210.817,58.427 ; D5.2@210.282,52.542 ccw(c209.599,51.988) 209.599,52.867 ; D5.2@210.301,53.175 cw(c209.599,53.822) 209.599,52.867 ; D5.2@210.609,52.867 209.598,52.867 ; K3.3@210.793,58.38 209.755,58.38 209.225,57.85 209.225,53.24 209.598,52.867
  Bottom Layer w0.3: U4.17@198.098,45.889 ccw(c197.757,46.231) 198.24,46.231 ; U4.17@198.19,44.921 198.24,44.971 198.24,46.97 199.94,48.67 206.37,48.67 209.27,51.57 209.27,57.7 209.952,58.382 K3.3@210.795,58.382 ; 209.165,57.595 cw(c210.082,56.677) K3.3@210.583,57.875 ; 209.481,57.911 cw(c210.269,57.123) K3.3@210.699,58.151 ; 209.798,58.228 cw(c210.456,57.57) K3.3@210.814,58.428
OUT_SIG2: D7.2 K5.3 U4.16 | length 35
  Top Layer w0.3: 203.322,57.926 cw(c204.177,57.072) K5.3@204.707,58.157 ; 203.62,58.223 cw(c204.372,57.471) K5.3@204.838,58.427 ; D7.2@204.141,52.57 ccw(c203.62,52.261) 203.62,52.867 ; D7.2@204.188,53.13 cw(c203.62,53.612) 203.62,52.867 ; D7.2@204.63,52.867 203.62,52.867 ; K5.3@204.814,58.38 203.777,58.38 203.247,57.85 203.247,53.24 203.62,52.867
  Bottom Layer w0.3: 196.87,46.231 ccw(c197.353,46.231) U4.16@197.011,45.889 ; U4.16@196.92,44.921 196.87,44.971 196.87,46.97 199.39,49.49 201.49,49.49 203.25,51.25 203.25,57.69 203.942,58.382 K5.3@204.816,58.382 ; 203.133,57.573 cw(c204.097,56.609) K5.3@204.61,57.872 ; 203.453,57.893 cw(c204.282,57.064) K5.3@204.722,58.15 ; 203.773,58.213 cw(c204.466,57.52) K5.3@204.835,58.428
OUT_SIG3: D9.2 K7.3 U4.15 | length 30.3
  Top Layer w0.3: 197.344,57.926 cw(c198.198,57.072) K7.3@198.728,58.157 ; 197.641,58.223 cw(c198.393,57.471) K7.3@198.859,58.427 ; D9.2@198.181,52.573 ccw(c197.641,52.223) 197.641,52.867 ; D9.2@198.21,53.14 cw(c197.641,53.596) 197.641,52.867 ; D9.2@198.651,52.867 197.641,52.867 ; K7.3@198.835,58.38 197.798,58.38 197.268,57.85 197.268,53.24 197.641,52.867
  Bottom Layer w0.3: U4.15@195.558,45.889 ccw(c195.217,46.231) 195.7,46.231 ; U4.15@195.65,44.921 195.7,44.971 195.7,46.94 197.33,48.57 197.33,57.59 198.122,58.382 K7.3@198.837,58.382 ; 197.306,57.566 cw(c198.213,56.659) K7.3@198.65,57.865 ; 197.639,57.899 cw(c198.39,57.148) K7.3@198.752,58.147
OUT_SIG4: D11.2 K9.3 U4.14 | length 30.6
  Top Layer w0.3: 191.365,57.926 cw(c192.219,57.072) K9.3@192.749,58.157 ; 191.662,58.223 cw(c192.414,57.471) K9.3@192.88,58.427 ; D11.2@192.02,53.094 cw(c191.662,53.262) 191.662,52.867 ; D11.2@192.036,52.649 ccw(c191.662,52.438) 191.662,52.867 ; D11.2@192.672,52.867 191.662,52.867 ; K9.3@192.857,58.38 191.819,58.38 191.289,57.85 191.289,53.24 191.662,52.867
  Bottom Layer w0.3: 191.471,57.951 cw(c192.253,57.169) K9.3@192.747,58.158 ; 191.765,58.245 cw(c192.449,57.562) K9.3@192.881,58.427 ; K9.3@192.859,58.382 191.902,58.382 191.36,57.84 191.36,49.63 194.38,46.61 U4.14@194.38,44.921 ; U4.14@194.289,45.889 ccw(c194.068,46.11) 194.38,46.11 ccw(c194.692,46.11) U4.14@194.471,45.889
OUT_SIG5: D13.2 K11.3 U4.13 | length 34.9
  Top Layer w0.3: 185.386,57.926 cw(c186.24,57.072) K11.3@186.77,58.157 ; 185.683,58.223 cw(c186.435,57.471) K11.3@186.902,58.427 ; D13.2@186.234,52.584 ccw(c185.683,52.189) 185.683,52.867 ; D13.2@186.234,53.15 cw(c185.683,53.545) 185.683,52.867 ; D13.2@186.693,52.867 185.683,52.867 ; K11.3@186.88,58.382 186.878,58.38 185.84,58.38 185.31,57.85 185.31,53.24 185.683,52.867
  Bottom Layer w0.3: K11.3@186.16,57.93 ccw(c185.342,57.416) 185.342,58.382 ; K11.3@186.16,58.834 cw(c185.342,59.348) 185.342,58.382 ; K11.3@186.88,58.382 185.342,58.382 ; 193.04,46.279 ccw(c193.591,46.279) U4.13@193.201,45.889 ; U4.13@193.11,44.921 193.04,44.991 193.04,46.73 188.09,51.68 185.19,51.68 184.65,52.22 184.65,57.69 185.342,58.382
OUT_SIG6: D15.2 K13.3 U4.12 | length 46.7
  Top Layer w0.3: 171.405,57.927 cw(c172.258,57.075) K13.3@172.788,58.157 ; 171.702,58.224 cw(c172.453,57.473) K13.3@172.92,58.427 ; 171.706,52.869 ccw(c171.706,54.17) D15.2@172.625,53.25 ; 171.889,52.869 cw(c171.889,51.828) D15.2@172.625,52.564 ; D15.2@172.714,52.869 171.703,52.869 171.33,53.242 171.33,57.852 171.86,58.382 K13.3@172.898,58.382
  Bottom Layer w0.3: K13.3@172.898,58.382 178.478,58.382 180.04,56.82 180.04,51.99 180.91,51.12 187.57,51.12 191.86,46.83 191.86,44.941 U4.12@191.84,44.921 ; K13.3@173.287,57.993 cw(c174.226,57.054) 174.226,58.382 cw(c174.226,59.71) K13.3@173.287,58.771 ; K13.3@173.499,57.781 cw(c174.95,56.33) 174.95,58.382 cw(c174.95,60.434) K13.3@173.499,58.983 ; U4.12@191.748,45.889 ccw(c191.479,46.158) 191.86,46.158
OUT_SIG7: D17.2 K15.3 U4.11 | length 51.3
  Top Layer w0.3: 165.476,57.927 cw(c166.329,57.075) K15.3@166.859,58.157 ; 165.773,58.224 cw(c166.524,57.473) K15.3@166.99,58.427 ; D17.2@166.418,53.194 cw(c165.774,53.668) 165.774,52.869 ; D17.2@166.455,52.575 ccw(c165.774,51.934) 165.774,52.869 ; D17.2@166.784,52.869 165.774,52.869 ; K15.3@166.969,58.382 165.931,58.382 165.401,57.852 165.401,53.242 165.774,52.869
  Bottom Layer w0.3: K15.3@166.969,58.382 169.248,58.382 171.39,56.24 171.39,51.71 172.57,50.53 186.94,50.53 190.58,46.89 190.58,44.74 U4.11@190.62,44.7 ; K15.3@167.357,57.993 cw(c168.296,57.054) 168.296,58.382 cw(c168.296,59.71) K15.3@167.357,58.771 ; K15.3@167.57,57.781 cw(c169.021,56.33) 169.021,58.382 cw(c169.021,60.434) K15.3@167.57,58.983 ; U4.11@190.478,45.889 ccw(c190.233,46.134) 190.58,46.134 ; 190.58,46.086 ccw(c190.858,46.086) U4.11@190.661,45.889
OUT_SIG8: D3.2 K2.3 U6.18 | length 36.2
  Top Layer w0.3: 159.547,57.927 cw(c160.399,57.075) K2.3@160.929,58.157 ; 159.843,58.224 cw(c160.594,57.473) K2.3@161.061,58.427 ; D3.2@160.423,53.168 cw(c159.844,53.578) 159.844,52.869 ; D3.2@160.44,52.583 ccw(c159.844,52.105) 159.844,52.869 ; D3.2@160.855,52.869 159.844,52.869 ; K2.3@161.039,58.382 160.001,58.382 159.471,57.852 159.471,53.242 159.844,52.869
  Bottom Layer w0.3: K2.3@161.039,58.382 163.718,58.382 165.49,56.61 165.49,52.19 171.42,46.26 ; K2.3@161.428,57.993 cw(c162.367,57.054) 162.367,58.382 cw(c162.367,59.71) K2.3@161.428,58.771 ; K2.3@161.64,57.781 cw(c163.091,56.33) 163.091,58.382 cw(c163.091,60.434) K2.3@161.64,58.983 ; U6.18@171.43,44.81 U6.18@171.53,44.71 ; U6.18@171.43,45.99 171.43,46.27 ; 171.43,46.182 ccw(c171.845,46.182) U6.18@171.551,45.889
OUT_SIG9: D6.2 K4.3 U6.17 | length 40.8
  Top Layer w0.3: 153.617,57.927 cw(c154.47,57.075) K4.3@155,58.157 ; 153.914,58.224 cw(c154.665,57.473) K4.3@155.132,58.427 ; D6.2@154.361,53.136 cw(c153.915,53.374) 153.915,52.869 ; D6.2@154.395,52.623 ccw(c153.915,52.278) 153.915,52.869 ; D6.2@154.925,52.869 153.915,52.869 ; K4.3@155.11,58.382 154.072,58.382 153.542,57.852 153.542,53.242 153.915,52.869
  Bottom Layer w0.3: K4.3@155.11,58.382 157.288,58.382 159.51,56.16 159.51,51.57 160.57,50.51 166.2,50.51 170.19,46.52 170.19,46.101 ; K4.3@155.499,57.993 cw(c156.437,57.054) 156.437,58.382 cw(c156.437,59.71) K4.3@155.499,58.771 ; K4.3@155.711,57.781 cw(c157.162,56.33) 157.162,58.382 cw(c157.162,60.434) K4.3@155.711,58.983 ; U6.17@170.099,45.889 ccw(c169.878,46.11) 170.19,46.11 ccw(c170.502,46.11) U6.17@170.281,45.889
OUT_SIG10: D8.2 K6.3 U6.16 | length 46
  Top Layer w0.3: 147.688,57.927 cw(c148.54,57.075) K6.3@149.07,58.157 ; 147.985,58.224 cw(c148.735,57.473) K6.3@149.202,58.427 ; D8.2@148.52,52.59 ccw(c147.986,52.218) 147.986,52.869 ; D8.2@148.522,53.147 cw(c147.986,53.526) 147.986,52.869 ; D8.2@148.996,52.869 147.986,52.869 ; K6.3@149.18,58.382 148.143,58.382 147.613,57.852 147.613,53.242 147.986,52.869
  Bottom Layer w0.3: K6.3@149.18,58.382 151.558,58.382 153.56,56.38 153.56,51.19 154.87,49.88 165.5,49.88 168.92,46.46 U6.16@168.92,46.01 ; K6.3@149.569,57.993 cw(c150.508,57.054) 150.508,58.382 cw(c150.508,59.71) K6.3@149.569,58.771 ; K6.3@149.781,57.781 cw(c151.232,56.33) 151.232,58.382 cw(c151.232,60.434) K6.3@149.781,58.983 ; U6.16@168.829,45.889 ccw(c168.608,46.11) 168.92,46.11 ccw(c169.232,46.11) U6.16@169.011,45.889
OUT_SIG11: D10.2 K8.3 U6.15 | length 51.1
  Top Layer w0.3: 141.758,57.927 cw(c142.611,57.075) K8.3@143.141,58.157 ; 142.055,58.224 cw(c142.806,57.473) K8.3@143.273,58.427 ; 142.101,52.869 cw(c142.101,51.76) D10.2@142.885,52.544 ; D10.2@142.877,53.221 cw(c142.056,54.001) 142.056,52.869 ; D10.2@143.066,52.869 142.056,52.869 ; K8.3@143.251,58.382 142.213,58.382 141.683,57.852 141.683,53.242 142.056,52.869
  Bottom Layer w0.3: K8.3@143.251,58.382 145.598,58.382 147.68,56.3 147.68,50.74 149.12,49.3 164.74,49.3 167.63,46.41 167.63,46.121 ; K8.3@143.64,57.993 cw(c144.579,57.054) 144.579,58.382 cw(c144.579,59.71) K8.3@143.64,58.771 ; K8.3@143.852,57.781 cw(c145.303,56.33) 145.303,58.382 cw(c145.303,60.434) K8.3@143.852,58.983 ; U6.15@167.63,44.941 U6.15@167.65,44.921 ; 167.63,46.158 ccw(c168.011,46.158) U6.15@167.742,45.889
OUT_SIG12: D12.2 K10.3 U6.14 | length 56
  Top Layer w0.3: 135.829,57.927 cw(c136.681,57.075) K10.3@137.211,58.157 ; 136.126,58.224 cw(c136.876,57.473) K10.3@137.343,58.427 ; 136.149,52.869 cw(c136.149,51.828) D12.2@136.885,52.564 ; D12.2@136.852,53.214 cw(c136.127,53.805) 136.127,52.869 ; D12.2@137.137,52.869 136.127,52.869 ; K10.3@137.321,58.382 136.284,58.382 135.754,57.852 135.754,53.242 136.127,52.869
  Bottom Layer w0.3: K10.3@137.321,58.382 139.418,58.382 141.68,56.12 141.68,50.288 143.268,48.7 164.18,48.7 166.39,46.49 166.39,46.111 ; K10.3@137.71,57.993 cw(c138.649,57.054) 138.649,58.382 cw(c138.649,59.71) K10.3@137.71,58.771 ; K10.3@137.922,57.781 cw(c139.373,56.33) 139.373,58.382 cw(c139.373,60.434) K10.3@137.922,58.983 ; U6.14@166.289,45.889 ccw(c166.043,46.134) 166.39,46.134 ; U6.14@166.38,44.921 U6.14@166.39,44.931 ; 166.39,46.086 ccw(c166.668,46.086) U6.14@166.471,45.889
OUT_SIG13: D14.2 K12.3 U6.13 | length 61
  Top Layer w0.3: 129.899,57.927 cw(c130.752,57.075) K12.3@131.282,58.157 ; 130.196,58.224 cw(c130.947,57.473) K12.3@131.414,58.427 ; 130.197,52.869 ccw(c130.197,53.762) D14.2@130.898,53.208 ; 130.199,52.869 cw(c130.199,51.828) D14.2@130.935,52.564 ; D14.2@131.207,52.869 130.197,52.869 129.824,53.242 129.824,57.852 130.354,58.382 K12.3@131.392,58.382
  Bottom Layer w0.3: K12.3@131.392,58.382 133.778,58.382 135.81,56.35 135.81,49.86 137.58,48.09 163.54,48.09 165.1,46.53 165.1,46.111 ; K12.3@131.781,57.993 cw(c132.72,57.054) 132.72,58.382 cw(c132.72,59.71) K12.3@131.781,58.771 ; K12.3@131.993,57.781 cw(c133.444,56.33) 133.444,58.382 cw(c133.444,60.434) K12.3@131.993,58.983 ; U6.13@165.019,45.889 ccw(c164.822,46.086) 165.1,46.086 ; U6.13@165.1,44.931 U6.13@165.11,44.921 ; 165.1,46.134 ccw(c165.447,46.134) U6.13@165.201,45.889
OUT_SIG14: D16.2 K14.3 U6.12 | length 65.6
  Top Layer w0.3: 123.97,57.927 cw(c124.822,57.075) K14.3@125.353,58.157 ; 124.267,58.224 cw(c125.018,57.473) K14.3@125.484,58.427 ; D16.2@124.813,53.177 cw(c124.268,53.505) 124.268,52.869 ; D16.2@124.868,52.602 ccw(c124.268,52.061) 124.268,52.869 ; D16.2@125.278,52.869 124.268,52.869 ; K14.3@125.462,58.382 124.425,58.382 123.895,57.852 123.895,53.242 124.268,52.869
  Bottom Layer w0.3: K14.3@125.462,58.382 127.818,58.382 129.72,56.48 129.72,49.6 131.8,47.52 162.81,47.52 163.83,46.5 163.83,46.111 ; K14.3@125.851,57.993 cw(c126.79,57.054) 126.79,58.382 cw(c126.79,59.71) K14.3@125.851,58.771 ; K14.3@126.063,57.781 cw(c127.515,56.33) 127.515,58.382 cw(c127.515,60.434) K14.3@126.063,58.983 ; U6.12@163.749,45.889 ccw(c163.552,46.086) 163.83,46.086 ; U6.12@163.83,44.931 U6.12@163.84,44.921 ; 163.83,46.134 ccw(c164.177,46.134) U6.12@163.931,45.889
OUT_SIG15: D18.2 K16.3 U6.11 | length 72.1
  Top Layer w0.3: 118.04,57.927 cw(c118.893,57.075) K16.3@119.423,58.157 ; 118.337,58.224 cw(c119.088,57.473) K16.3@119.555,58.427 ; 118.489,52.869 cw(c118.489,51.828) D18.2@119.225,52.564 ; D18.2@119.219,53.243 cw(c118.338,54.091) 118.338,52.869 ; D18.2@119.349,52.869 118.338,52.869 ; K16.3@119.533,58.382 118.495,58.382 117.965,57.852 117.965,53.242 118.338,52.869
  Bottom Layer w0.3: K16.3@119.533,58.382 122.008,58.382 123.94,56.45 123.94,49.18 126.21,46.91 162.15,46.91 162.57,46.49 U6.11@162.57,44.921 ; K16.3@119.922,57.993 cw(c120.861,57.054) 120.861,58.382 cw(c120.861,59.71) K16.3@119.922,58.771 ; K16.3@120.134,57.781 cw(c121.585,56.33) 121.585,58.382 cw(c121.585,60.434) K16.3@120.134,58.983 ; U6.11@162.479,45.889 ccw(c162.258,46.11) 162.57,46.11 ccw(c162.882,46.11) U6.11@162.661,45.889
PA0: P2.14 U3.4 U4.1 | length 173.2
  Bottom Layer w0.254: P2.14@75.438,75.831 cw(c75.438,74.327) 76.502,75.39 cw(c77.565,76.454) P2.14@76.061,76.454 ; P2.14@75.438,76.085 cw(c75.438,75.194) 76.068,75.824 cw(c76.698,76.454) P2.14@75.807,76.454 ; P2.14@75.438,76.454 76.76,75.132 76.76,72.45 81.03,68.18 110.35,68.18 113.53,65 113.53,49.43 120.7,42.26 153.68,42.26 156.46,39.48 156.46,32.75 158.73,30.48 168.68,30.48 174.77,36.57 179.06,36.57 179.43,36.94 179.43,40.99 180.935,42.495 U3.4@183.769,42.495
  Bottom Layer w0.3: U3.4@183.769,42.495 194.765,42.495 199.47,37.79 199.47,35.889 U4.1@199.46,35.879 ; U4.1@199.368,36.847 ccw(c199.123,37.092) 199.47,37.092 ; 199.47,37.043 ccw(c199.748,37.043) U4.1@199.551,36.847
PA1: P2.13 U3.5 U4.2 | length 169.9
  Bottom Layer w0.254: P2.13@75,73.471 cw(c73.963,72.422) 75.438,72.422 ; P2.13@75.179,73.652 cw(c74.564,73.03) 75.438,73.03 cw(c76.312,73.03) P2.13@75.697,73.652 ; P2.13@75.438,73.914 75.438,72.422 ; P2.13@75.876,73.471 ccw(c76.913,72.422) 75.438,72.422 ; U3.5@183.769,41.845 181.255,41.845 179.94,40.53 179.94,36.61 179.38,36.05 175.03,36.05 168.94,29.96 158.47,29.96 155.94,32.49 155.94,39.28 153.49,41.73 120.29,41.73 113.01,49.01 113.01,64.8 110.16,67.65 80.21,67.65 75.438,72.422
  Bottom Layer w0.3: U3.5@183.769,41.845 194.055,41.845 198.21,37.69 198.21,35.899 U4.2@198.19,35.879 ; U4.2@198.098,36.847 ccw(c197.829,37.116) 198.21,37.116

## Text inside footprints (layer, text, board x,y; h text height)
J1: Top Overlay "6" at 202.521,4.975 h1 r180; Top Overlay "9" at 194.211,4.975 h1 r180; Top Overlay "5" at 188.99,12.91 h1; Top Overlay "1" at 205.18,13.2 h1
L2: Top Overlay "GS" at 40.87,47.91 h1 r90
L4: Top Overlay "GS" at 17.73,37.22 h1 r90
P1: Top Overlay "1" at 57.658,25.15 h1; Top Overlay "2" at 57.658,27.69 h1
P2: Top Overlay "1" at 57.658,73.406 h1; Top Overlay "2" at 57.658,75.946 h1
P5: Top Overlay "1" at 211.43,29.06 h1; Top Overlay "2" at 211.55,26.26 h1; Top Overlay "5" at 201.64,29.2 h1; Top Overlay "6" at 201.55,26.15 h1